# Altium PCB InhalerCap.PcbDoc
Units mm, origin at the board's own origin, x right, y up, seen from the top; angles counter-clockwise.
Board outline 31 x 31 mm, 4 copper layers (Top Layer, Internal Plane 1, Internal Plane 2, Bottom Layer), stack 0.462 mm thick; 5 components, 8 nets, 28 pads, 3 vias.
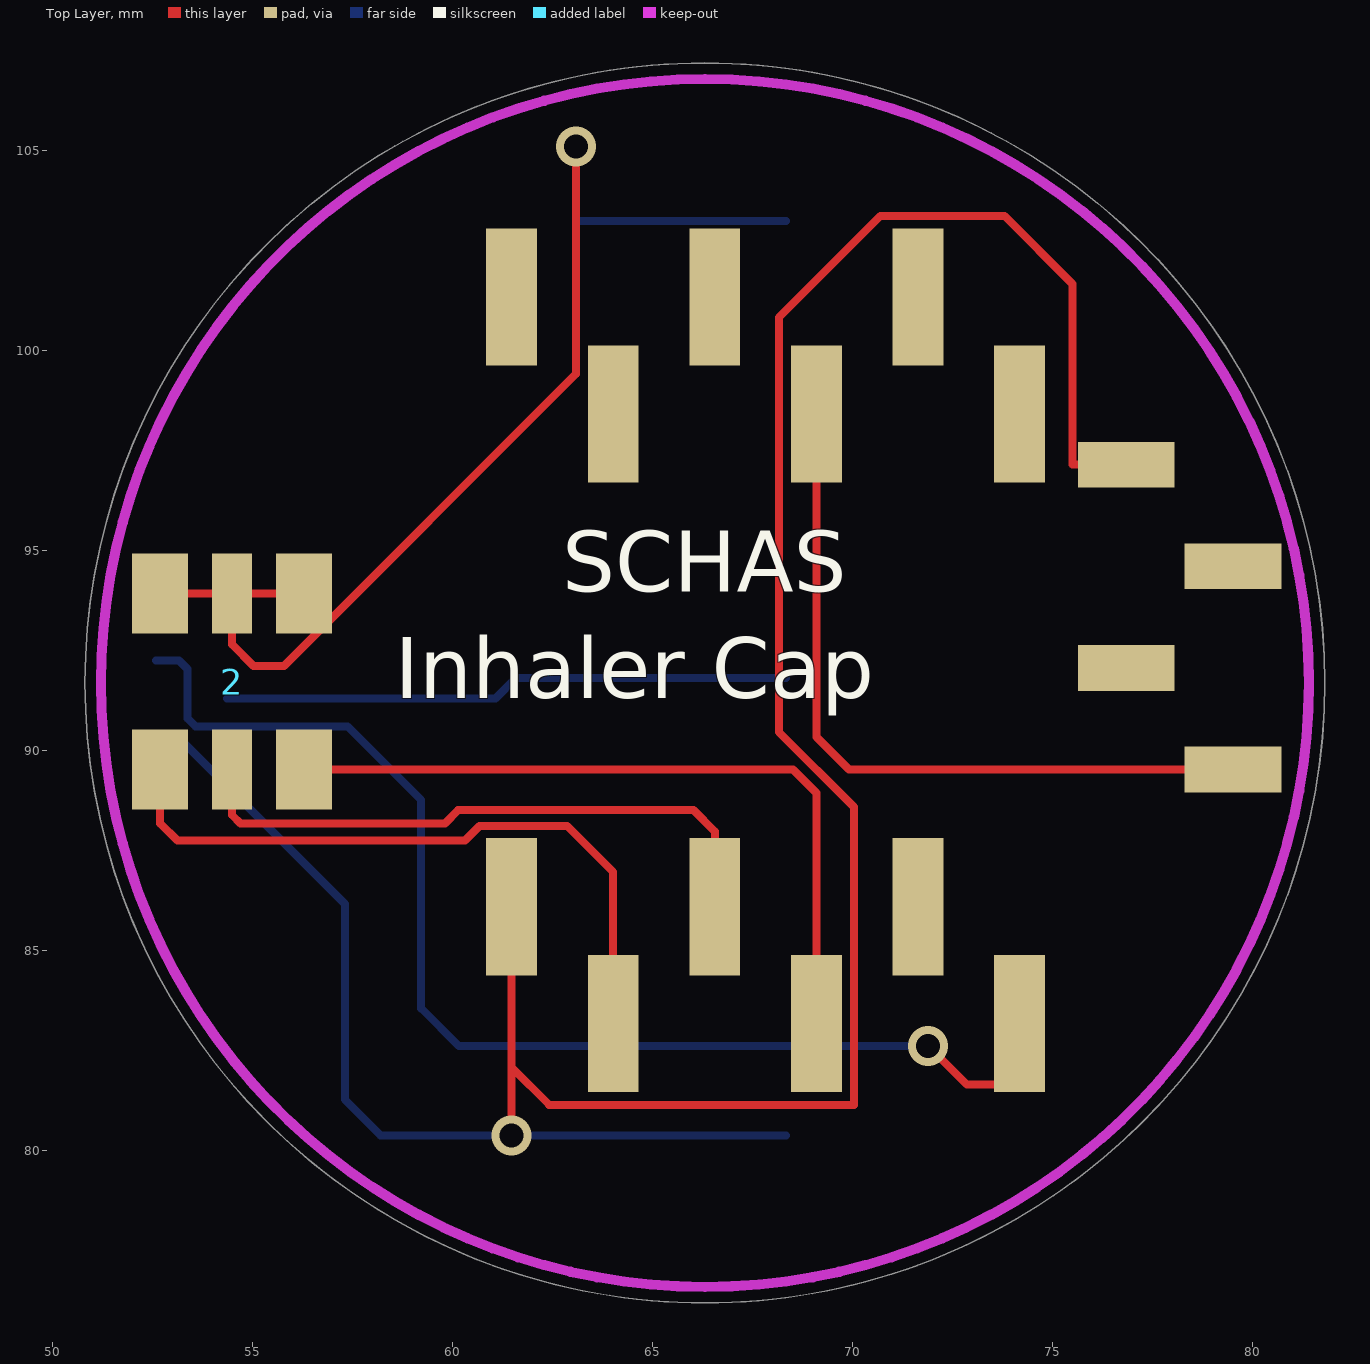
[diagram p0: Top Layer view]
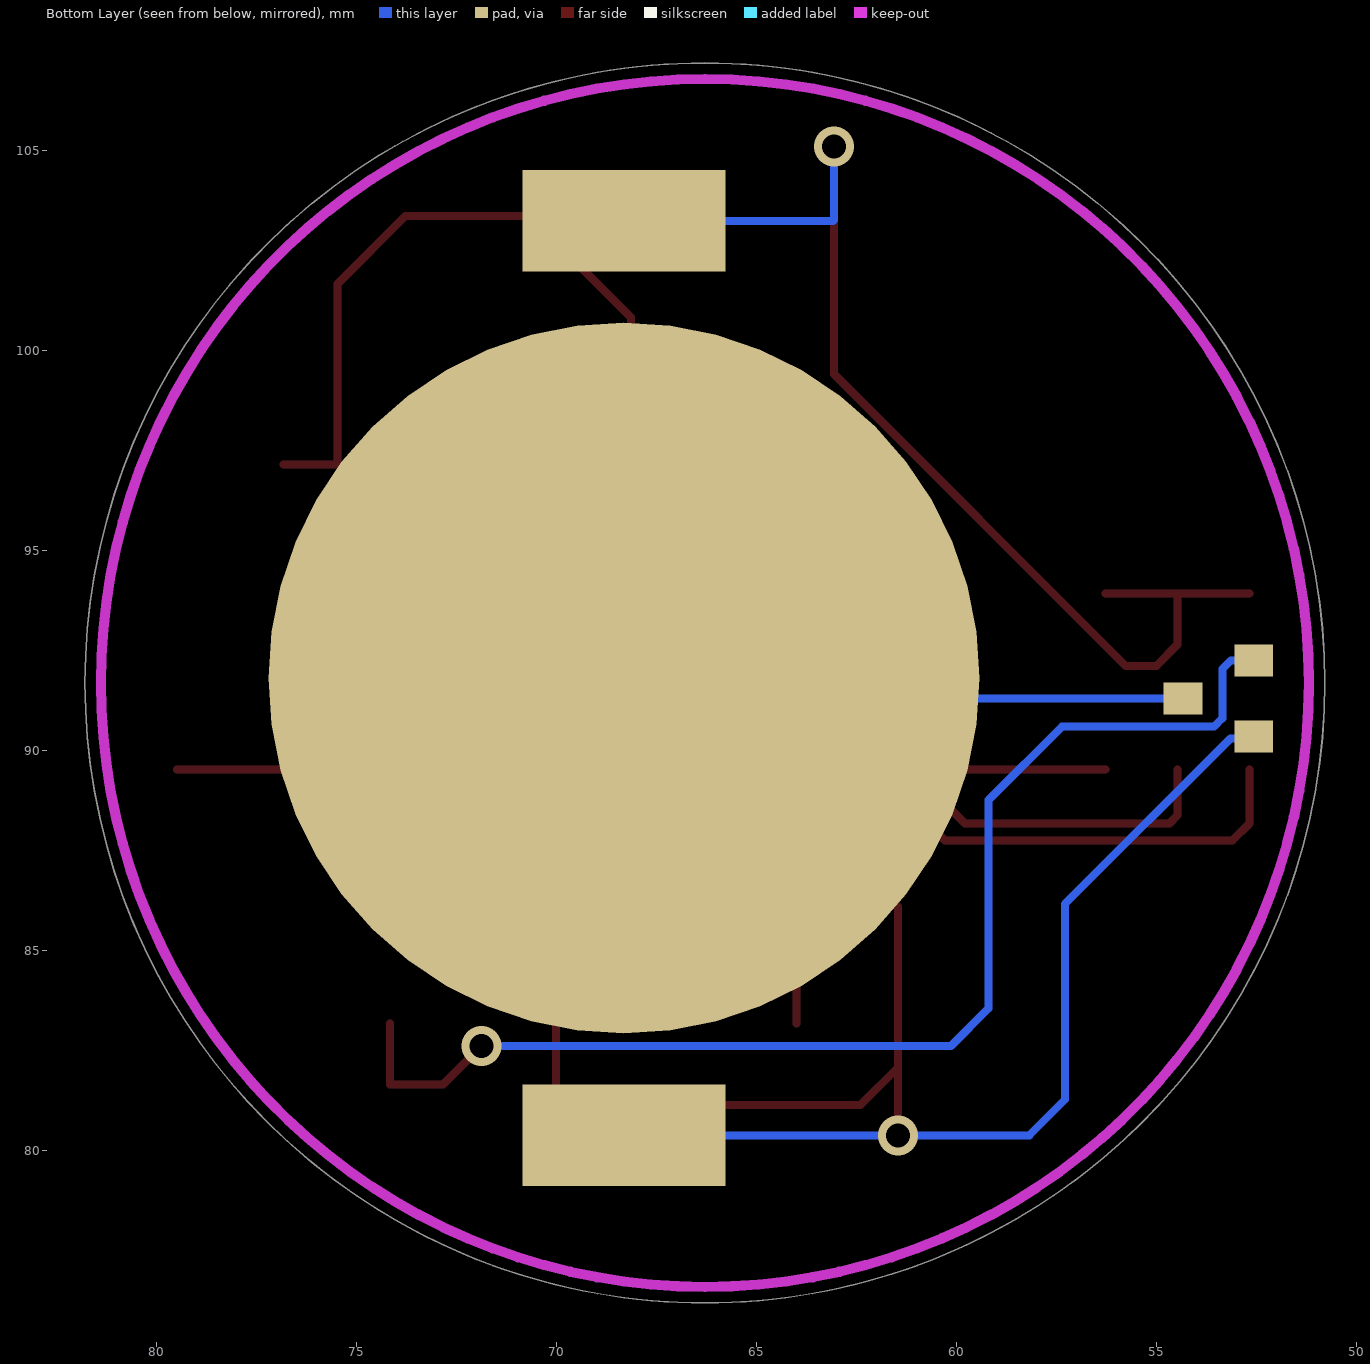
[diagram p1: Bottom Layer view, seen from below]
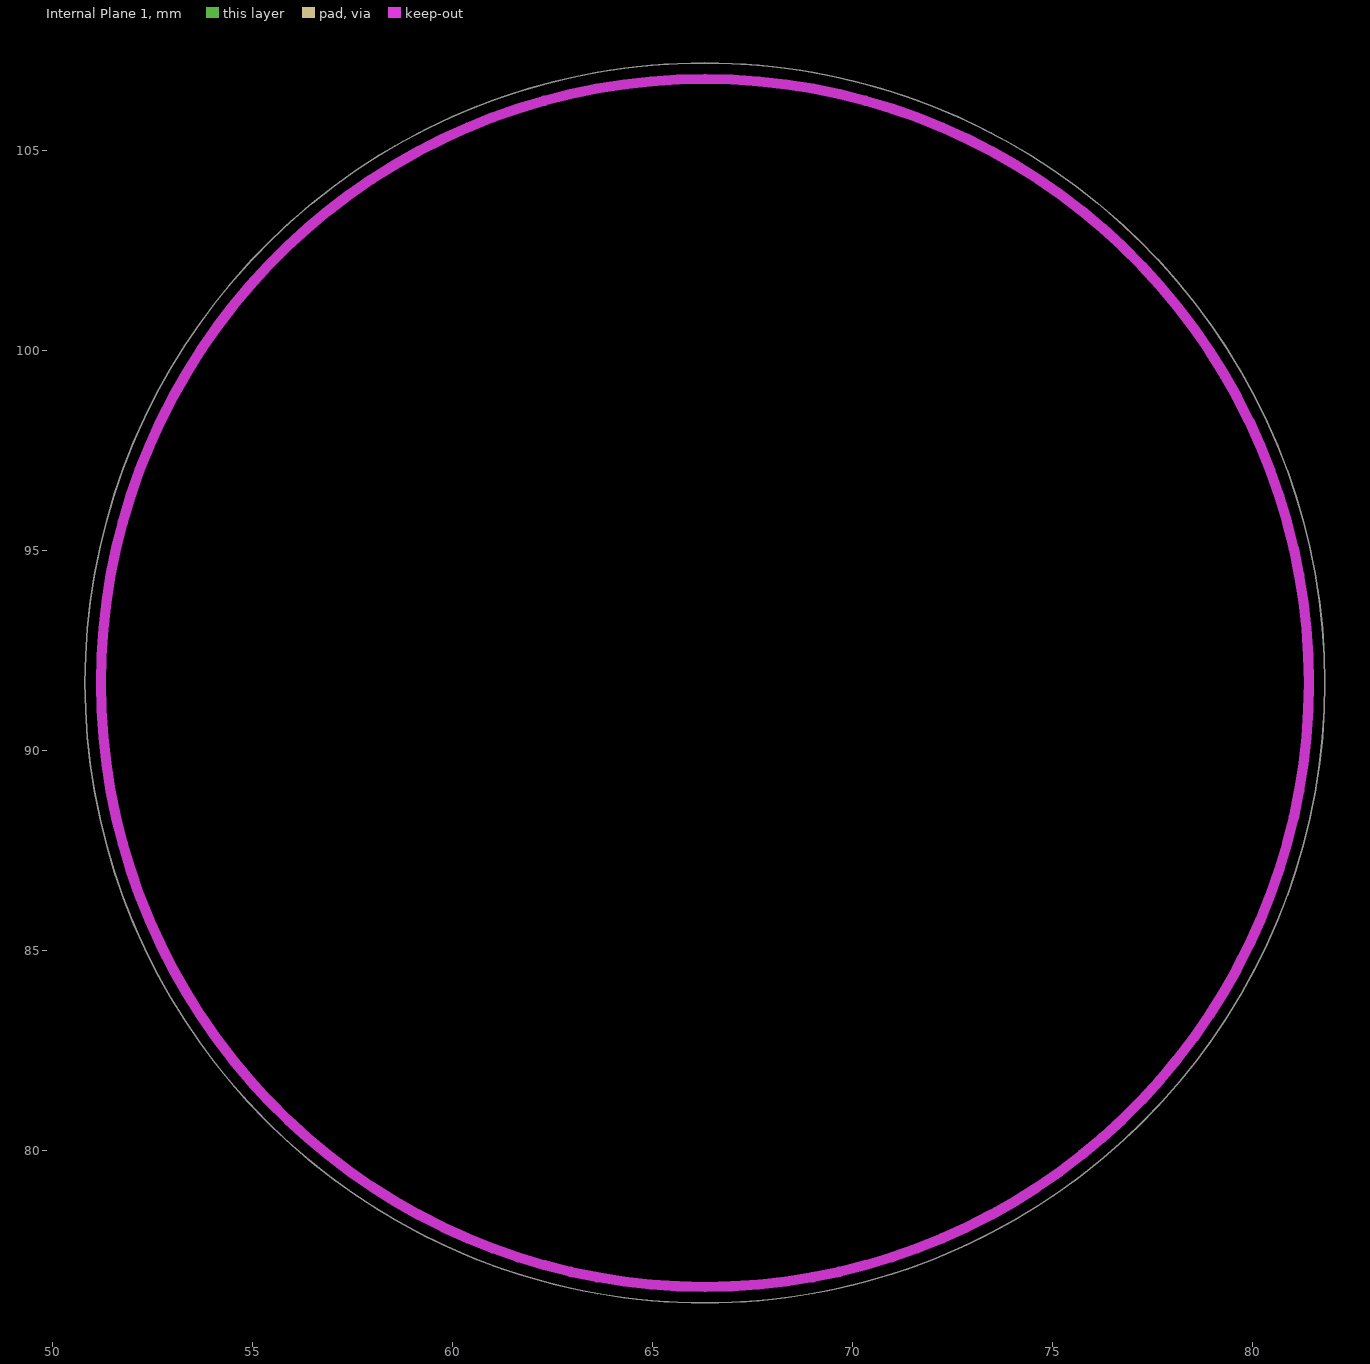
[diagram p2: Internal Plane 1, clearances drawn from the general rule]
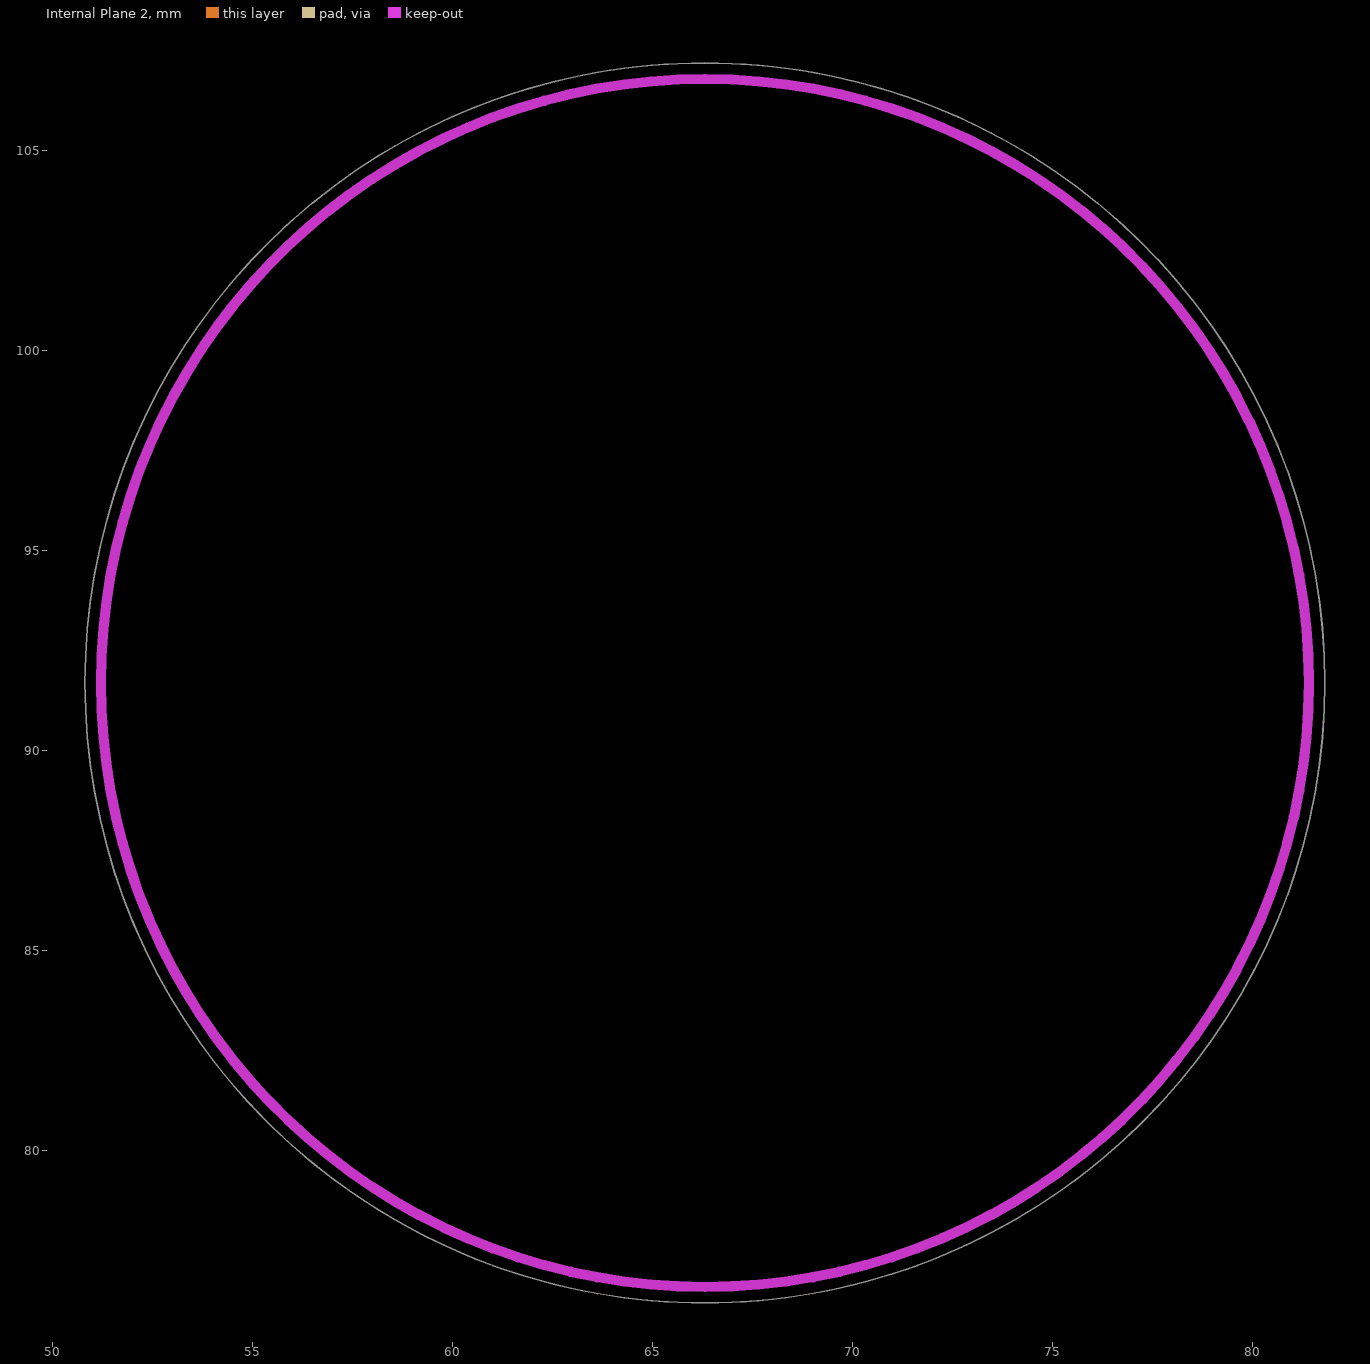
[diagram p3: Internal Plane 2, clearances drawn from the general rule]

## Layer stack, top to bottom
Top Solder: solder mask 0.0102, Solder Resist, Dk 3.5
Top Layer: signal copper 0.0356
Internal Plane 1: plane copper 0.0356
Internal Plane 2: plane copper 0.0356
Dielectric 1: dielectric 0.32, FR-4, Dk 4.8
Bottom Layer: signal copper 0.0356
Bottom Solder: solder mask 0.0102, Solder Resist, Dk 3.5

## Board outline
81.8,91.7 ccw(c66.3,91.7) 66.3,107.2 ccw(c66.3,91.7) 50.8,91.7 ccw(c66.3,91.7) 66.3,76.2 ccw(c66.3,91.7) 81.8,91.7 ccw(c66.3,91.7)

## Design rules (kind name [scope] priority, off if disabled: settings)
Clearance [All] p1: gap=0.2
PlaneClearance [All] p1: clearance=0.508
PlaneConnect [All] p1: planeconnectstyle=Relief reliefexpansion=0.508 reliefentries=4 reliefconductorwidth=0.254 reliefairgap=0.254
PolygonConnect [All] p1: connectstyle=Relief reliefconductorwidth=0.254 reliefentries=4 polygonreliefangle="90 Angle" airgapwidth=0.254
RoomDefinition InhalerCap [InComponentClass('InhalerCap')] p1: confinementstyle=ConfineIn formatcopy=TRUE lockcomponents=FALSE outline 41.148,78.74 101.854,78.74 101.854,104.648 41.148,104.648
RoutingVias [All] p1: holewidth=0.6 width=1 viastyle="Through Hole" minholewidth=0.711 minwidth=1.27 maxholewidth=0.711 maxwidth=1.27
SolderMaskExpansion [All] p1: expansion=0.102
Width [All] p1: maxlimit=0.2 minlimit=0.2 preferedwidth=0.2
28 further rules are at their usual default settings.

## Classes and differential pairs
component class InhalerCap: ""

## Components (designator, comment, footprint, x,y, rotation, side; value= is the part's Value field where it differs from the comment)
0 "BLE NANO" BLE_NANO 61.468,86.106 r90 top
1 "Component_1" Button 76.835,97.155 r0 top
2 "" BIG_LED 52.683,93.935 r270 top
3 "Component_1" MOSFET_3_PIN 54.348,91.313 r90 bottom
4 "Power" CR2032_Holder 68.326,91.821 r90 bottom

## Footprints (in the part's own frame and the unit in brackets; to place one, negate y for a bottom-side part, rotate by r counter-clockwise, add the part's x,y. Pads: shape width x height; smd on the part's side, far side on the other; paste and mask are expansions set on the pad)
BIG_LED [mm] "SMT RGB LED 6 PIN"
  rect 2x1.4 smd: 0(0,0) 2(0,3.6) 3(4.4,0) 5(4.4,3.6)
  rect 2x1 smd: 1(0,1.8) 4(4.4,1.8)
BLE_NANO [mil]
  rect 135x50 smd: 1(0,0) 2(-115,-100) 3(0,-200) 4(-115,-300) 5(0,-400) 6(-115,-500) 7(600,0) 8(485,-100) 9(600,-200) 10(485,-300) 11(600,-400) 12(485,-500)
Button [mil] "SMD Female Header for Pushbutton"
  rect 95x45 smd: 1(0,0) 2(105,-100) 3(0,-200) 4(105,-300)
CR2032_Holder [mm] "20\" Coin Cell Battery Holder"
  round 17.78 smd: 0(0,0)
  rect 2.54x5.08 smd: 1(-11.43,0) 2(11.43,0)
MOSFET_3_PIN [mm]
  rect 0.802x0.972 smd: 1(0,0) 2(-0.95,-1.77) 3(0.95,-1.77)

## Part data
2: library part RGB_LED
4: library part Coin_Cell_Battery_Holder

## Via types
v1: diameter 1, hole 0.6, Top Layer to Bottom Layer, 3 vias

## Nets (pads, with @x,y where several pads share a name; then routed paths per layer and width w, separated by ;. In a path a pad name is that pad's centre, name@x,y a point inside that pad or via, vN(x,y) a via of type N, cw(c..) or ccw(c..) an arc to the next point about the centre after c; other vN are vias at no path point)
Net0_1: 0.1 1.1 3.2 4.1 | length 72.9
  Top Layer w0.2: v1(61.468,80.391) 61.468,82.093 ; 0.1 61.468,82.093 ; 1.1 75.489,97.155 75.489,101.676 73.787,103.378 70.688,103.378 68.148,100.838 68.148,90.475 70.028,88.595 70.028,81.153 62.408,81.153 61.468,82.093
  Bottom Layer w0.2: 3.2 52.578,90.311 53.162,90.311 57.302,86.17 57.302,81.28 58.191,80.391 v1(61.468,80.391) 4.1
Net0_2: 0.2 2.3 | length 17.3
  Top Layer w0.2: 2.3 52.683,88.189 53.115,87.757 60.3,87.757 60.663,88.121 62.857,88.121 64.008,86.97 0.2
Net0_3: 0.3 2.4 | length 15.5
  Top Layer w0.2: 2.4 54.483,88.392 54.686,88.189 59.801,88.189 60.133,88.521 66.013,88.521 66.548,87.986 0.3
Net0_4: 0.4 2.5 | length 18.8
  Top Layer w0.2: 2.5 68.504,89.535 69.088,88.951 0.4
Net0_6: 0.6 3.3 | length 31.3
  Top Layer w0.2: v1(71.882,82.626) 72.847,81.661 74.168,81.661 0.6
  Bottom Layer w0.2: 3.3 53.152,92.263 53.365,92.05 53.365,90.815 53.569,90.612 57.368,90.612 59.207,88.773 59.207,83.566 60.147,82.626 v1(71.882,82.626)
Net0_10: 0.10 1.4 | length 18.8
  Top Layer w0.2: 0.10 69.088,90.348 69.901,89.535 1.4
Net2_0: 2.0 2.1 2.2 4.2 | length 29.5
  Top Layer w0.2: 2.0 2.1 ; 2.2 2.1 ; v1(63.073,105.11) 63.073,99.42 55.778,92.126 55.016,92.126 54.483,92.659 2.1
  Bottom Layer w0.2: v1(63.073,105.11) 63.073,103.272 63.094,103.251 4.2
Net3_1: 3.1 4.0 | length 14.2
  Bottom Layer w0.2: 3.1 61.062,91.313 61.57,91.821 4.0
pads on no net: 0.5 0.7 0.8 0.9 0.11 0.12 1.2 1.3

## Keep-outs
Keep-Out Layer:
  circle w0.254: c66.3,91.7 r15.1

## Silkscreen, mask and mechanical layers (free items; w line width, h text height)
Top Overlay:
  text "SCHAS" at 62.738,93.98 h1.52
  text "Inhaler Cap" at 58.547,91.313 h1.52

## Dimensions
81.4,91.7 to 51.2,91.7 on Mechanical 1